# EAGLE board AutoSpielSimplified 2 Finished (EAGLE 9.2.0)
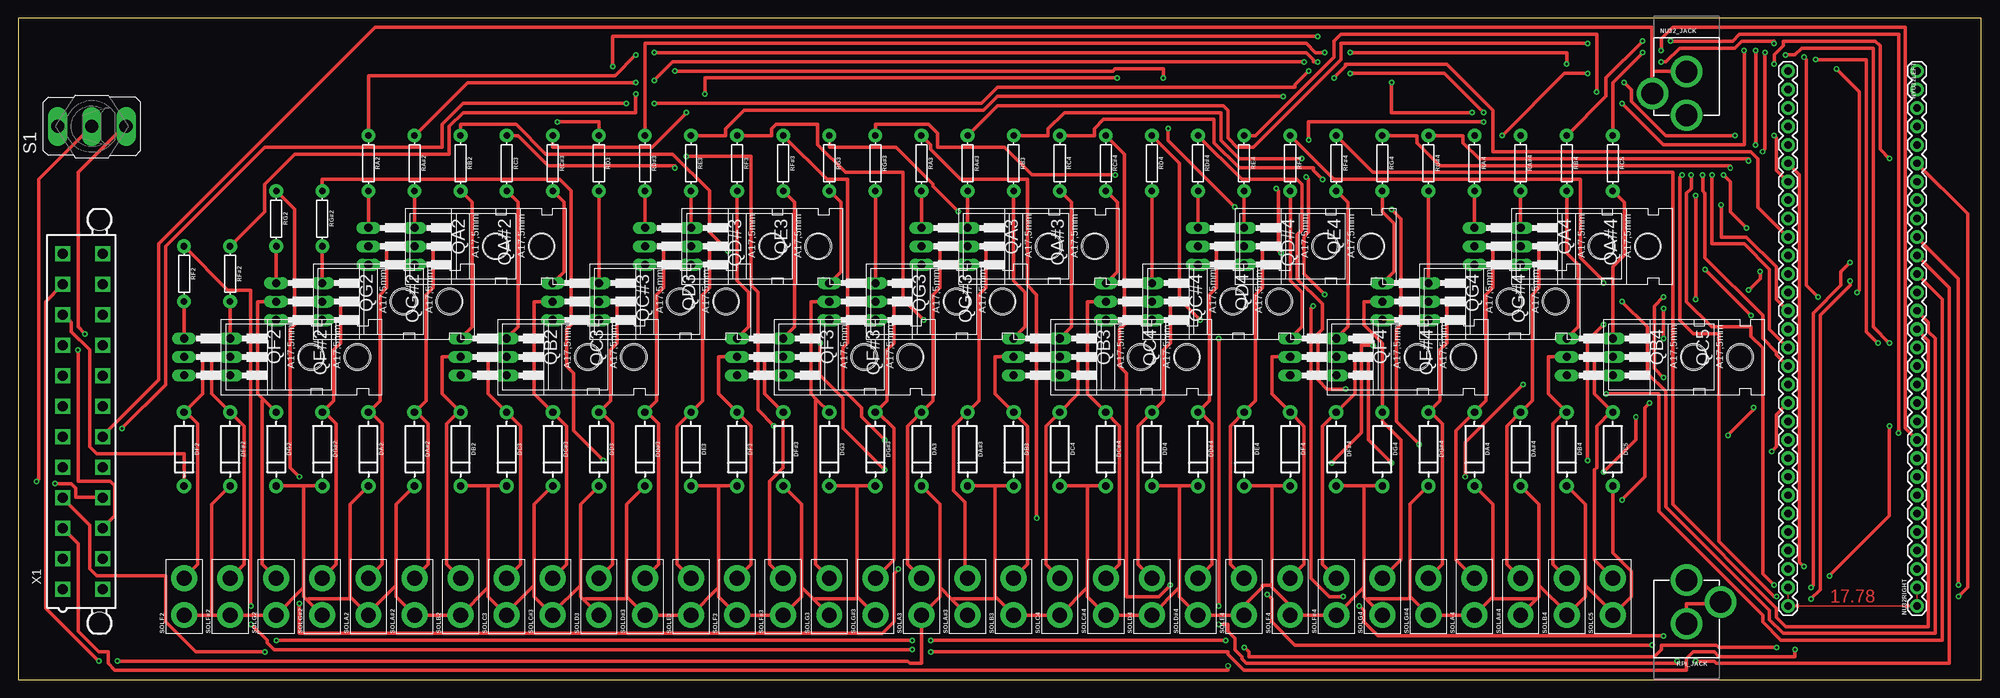
[diagram p0: board, top side]
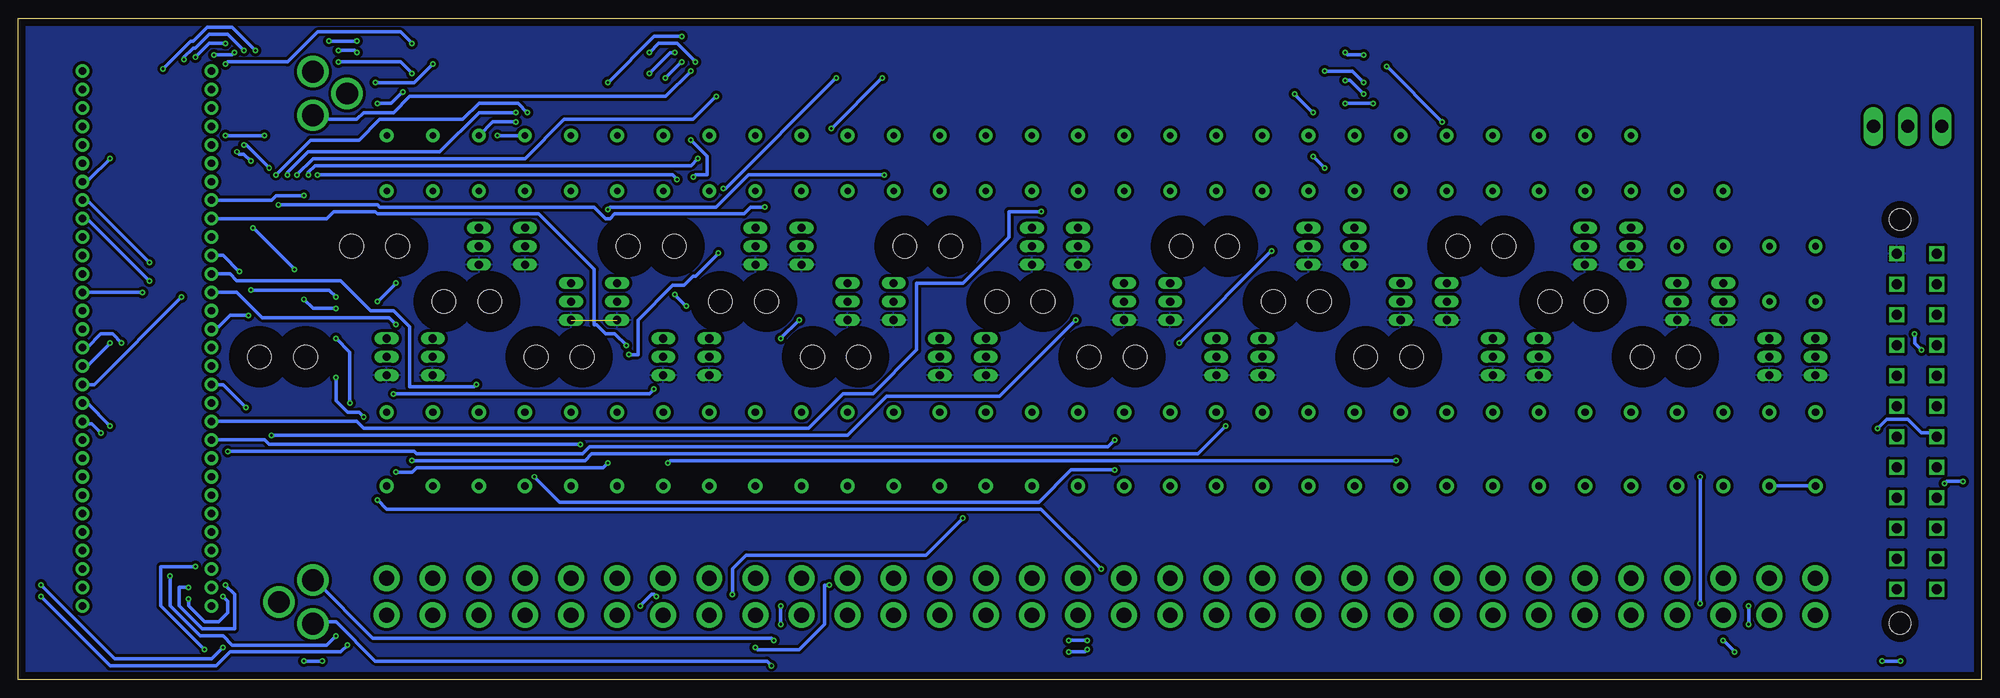
[diagram p1: board, bottom side, seen from below]

Size 270.49 x 91.11 mm. Coordinates in mm from the lower left corner, seen from the top.
Outline: 0,0 270.49,0 270.49,91.11 0,91.11 0,0
Copper layers (1*16): Top 0.035mm / dielectric 1.5mm / Bottom 0.035mm
Design rules "default *": minimum track width 18mil, minimum drill 0.35mm, track to track 16mil, track to pad 16mil, pad to pad 16mil, via to via 16mil, smd to smd 16mil, copper to edge 40mil, drill to drill 16mil, minimum pad ring 10mil, minimum via ring 8mil, stop-mask expansion 4mil, vias tented up to drill 0mil, thermal gap 10mil

## Footprints (pad centres in the part's own frame; a part is rotated, then mirrored left to right if it is on the bottom)
DIODE-1N4001 = drill 1 pad 1.981: A -5.08,0; C 5.08,0
POWER_JACK_PTH = drill 2.997 pad 4.318: GND 0,7.7; GNDBREAK 4.7,10.7; PWR 0,13.7
1X30 = drill 1.016 pad 1.88: 1 0,0; 2 2.54,0; 3 5.08,0; 4 7.62,0; 5 10.16,0; 6 12.7,0; 7 15.24,0; 8 17.78,0; 9 20.32,0; 10 22.86,0; 11 25.4,0; 12 27.94,0; 13 30.48,0; 14 33.02,0; 15 35.56,0; 16 38.1,0; 17 40.64,0; 18 43.18,0; 19 45.72,0; 20 48.26,0; 21 50.8,0; 22 53.34,0; 23 55.88,0; 24 58.42,0; 25 60.96,0; 26 63.5,0; 27 66.04,0; 28 68.58,0; 29 71.12,0; 30 73.66,0
TO220AH = drill 1.118 long: B -2.54,-6.35; C 0,-6.35; E 2.54,-6.35 | hole 3.302: 0,11.176
AXIAL-0.3 = drill 0.9 pad 1.88: P$1 -3.81,0; P$2 3.81,0
M9040P = drill 1.803 long: 1 0,4.699; 2 0,0; 3 0,-4.699
1X02_XTRA_BIG = drill 2.057 pad 3.556: 1 -2.54,0; 2 2.54,0
5566-24 = drill 1.4 square: 1 23.1,-2.75; 2 18.9,-2.75; 3 14.7,-2.75; 4 10.5,-2.75; 5 6.3,-2.75; 6 2.1,-2.75; 7 -2.1,-2.75; 8 -6.3,-2.75; 9 -10.5,-2.75; 10 -14.7,-2.75; 11 -18.9,-2.75; 12 -23.1,-2.75; 13 23.1,2.75; 14 18.9,2.75; 15 14.7,2.75; 16 10.5,2.75; 17 6.3,2.75; 18 2.1,2.75; 19 -2.1,2.75; 20 -6.3,2.75; 21 -10.5,2.75; 22 -14.7,2.75; 23 -18.9,2.75; 24 -23.1,2.75 | hole 3: 27.8,2.29; -27.8,2.29

## Placement (x,y rotation side)
DA2  1A/50V/1.1V  [DIODE-1N4001]  48.26,31.75 270 top
DA3  1A/50V/1.1V  [DIODE-1N4001]  124.46,31.75 270 top
DA4  1A/50V/1.1V  [DIODE-1N4001]  200.66,31.75 270 top
DA#2  1A/50V/1.1V  [DIODE-1N4001]  54.61,31.75 270 top
DA#3  1A/50V/1.1V  [DIODE-1N4001]  130.81,31.75 270 top
DA#4  1A/50V/1.1V  [DIODE-1N4001]  207.01,31.75 270 top
DB2  1A/50V/1.1V  [DIODE-1N4001]  60.96,31.75 270 top
DB3  1A/50V/1.1V  [DIODE-1N4001]  137.16,31.75 270 top
DB4  1A/50V/1.1V  [DIODE-1N4001]  213.36,31.75 270 top
DC3  1A/50V/1.1V  [DIODE-1N4001]  67.31,31.75 270 top
DC4  1A/50V/1.1V  [DIODE-1N4001]  143.51,31.75 270 top
DC5  1A/50V/1.1V  [DIODE-1N4001]  219.71,31.75 270 top
DC#3  1A/50V/1.1V  [DIODE-1N4001]  73.66,31.75 270 top
DC#4  1A/50V/1.1V  [DIODE-1N4001]  149.86,31.75 270 top
DD3  1A/50V/1.1V  [DIODE-1N4001]  80.01,31.75 270 top
DD4  1A/50V/1.1V  [DIODE-1N4001]  156.21,31.75 270 top
DD#3  1A/50V/1.1V  [DIODE-1N4001]  86.36,31.75 270 top
DD#4  1A/50V/1.1V  [DIODE-1N4001]  162.56,31.75 270 top
DE3  1A/50V/1.1V  [DIODE-1N4001]  92.71,31.75 270 top
DE4  1A/50V/1.1V  [DIODE-1N4001]  168.91,31.75 270 top
DF2  1A/50V/1.1V  [DIODE-1N4001]  22.86,31.75 270 top
DF3  1A/50V/1.1V  [DIODE-1N4001]  99.06,31.75 270 top
DF4  1A/50V/1.1V  [DIODE-1N4001]  175.26,31.75 270 top
DF#2  1A/50V/1.1V  [DIODE-1N4001]  29.21,31.75 270 top
DF#3  1A/50V/1.1V  [DIODE-1N4001]  105.41,31.75 270 top
DF#4  1A/50V/1.1V  [DIODE-1N4001]  181.61,31.75 270 top
DG2  1A/50V/1.1V  [DIODE-1N4001]  35.56,31.75 270 top
DG3  1A/50V/1.1V  [DIODE-1N4001]  111.76,31.75 270 top
DG4  1A/50V/1.1V  [DIODE-1N4001]  187.96,31.75 270 top
DG#2  1A/50V/1.1V  [DIODE-1N4001]  41.91,31.75 270 top
DG#3  1A/50V/1.1V  [DIODE-1N4001]  118.11,31.75 270 top
DG#4  1A/50V/1.1V  [DIODE-1N4001]  194.31,31.75 270 top
NU32_JACK  POWER_JACK  [POWER_JACK_PTH]  229.87,91.44 180 top
NU32RIGHT  [1X30]  261.62,10.16 90 top
NYU32LEFT  [1X30]  243.84,10.16 90 top
QA2  TIP120  [TO220AH]  54.61,59.69 270 top
QA3  TIP120  [TO220AH]  130.81,59.69 270 top
QA4  TIP120  [TO220AH]  207.01,59.69 270 top
QA#2  TIP120  [TO220AH]  60.96,59.69 270 top
QA#3  TIP120  [TO220AH]  137.16,59.69 270 top
QA#4  TIP120  [TO220AH]  213.36,59.69 270 top
QB2  TIP120  [TO220AH]  67.31,44.45 270 top
QB3  TIP120  [TO220AH]  143.51,44.45 270 top
QB4  TIP120  [TO220AH]  219.71,44.45 270 top
QC3  TIP120  [TO220AH]  73.66,44.45 270 top
QC4  TIP120  [TO220AH]  149.86,44.45 270 top
QC5  TIP120  [TO220AH]  226.06,44.45 270 top
QC#3  TIP120  [TO220AH]  80.01,52.07 270 top
QC#4  TIP120  [TO220AH]  156.21,52.07 270 top
QD3  TIP120  [TO220AH]  86.36,52.07 270 top
QD4  TIP120  [TO220AH]  162.56,52.07 270 top
QD#3  TIP120  [TO220AH]  92.71,59.69 270 top
QD#4  TIP120  [TO220AH]  168.91,59.69 270 top
QE3  TIP120  [TO220AH]  99.06,59.69 270 top
QE4  TIP120  [TO220AH]  175.26,59.69 270 top
QF2  TIP120  [TO220AH]  29.21,44.45 270 top
QF3  TIP120  [TO220AH]  105.41,44.45 270 top
QF4  TIP120  [TO220AH]  181.61,44.45 270 top
QF#2  TIP120  [TO220AH]  35.56,44.45 270 top
QF#3  TIP120  [TO220AH]  111.76,44.45 270 top
QF#4  TIP120  [TO220AH]  187.96,44.45 270 top
QG2  TIP120  [TO220AH]  41.91,52.07 270 top
QG3  TIP120  [TO220AH]  118.11,52.07 270 top
QG4  TIP120  [TO220AH]  194.31,52.07 270 top
QG#2  TIP120  [TO220AH]  48.26,52.07 270 top
QG#3  TIP120  [TO220AH]  124.46,52.07 270 top
QG#4  TIP120  [TO220AH]  200.66,52.07 270 top
RA2  1k  [AXIAL-0.3]  48.26,71.12 270 top
RA3  1k  [AXIAL-0.3]  124.46,71.12 270 top
RA4  1k  [AXIAL-0.3]  200.66,71.12 270 top
RA#2  1k  [AXIAL-0.3]  54.61,71.12 270 top
RA#3  1k  [AXIAL-0.3]  130.81,71.12 270 top
RA#4  1k  [AXIAL-0.3]  207.01,71.12 270 top
RB2  1k  [AXIAL-0.3]  60.96,71.12 270 top
RB3  1k  [AXIAL-0.3]  137.16,71.12 270 top
RB4  1k  [AXIAL-0.3]  213.36,71.12 270 top
RC3  1k  [AXIAL-0.3]  67.31,71.12 270 top
RC4  1k  [AXIAL-0.3]  143.51,71.12 270 top
RC5  1k  [AXIAL-0.3]  219.71,71.12 270 top
RC#3  1k  [AXIAL-0.3]  73.66,71.12 270 top
RC#4  1k  [AXIAL-0.3]  149.86,71.12 270 top
RD3  1k  [AXIAL-0.3]  80.01,71.12 270 top
RD4  1k  [AXIAL-0.3]  156.21,71.12 270 top
RD#3  1k  [AXIAL-0.3]  86.36,71.12 270 top
RD#4  1k  [AXIAL-0.3]  162.56,71.12 270 top
RE3  1k  [AXIAL-0.3]  92.71,71.12 270 top
RE4  1k  [AXIAL-0.3]  168.91,71.12 270 top
RF2  1k  [AXIAL-0.3]  22.86,55.88 270 top
RF3  1k  [AXIAL-0.3]  99.06,71.12 270 top
RF4  1k  [AXIAL-0.3]  175.26,71.12 270 top
RF#2  1k  [AXIAL-0.3]  29.21,55.88 270 top
RF#3  1k  [AXIAL-0.3]  105.41,71.12 270 top
RF#4  1k  [AXIAL-0.3]  181.61,71.12 270 top
RG2  1k  [AXIAL-0.3]  35.56,63.5 270 top
RG3  1k  [AXIAL-0.3]  111.76,71.12 270 top
RG4  1k  [AXIAL-0.3]  187.96,71.12 270 top
RG#2  1k  [AXIAL-0.3]  41.91,63.5 270 top
RG#3  1k  [AXIAL-0.3]  118.11,71.12 270 top
RG#4  1k  [AXIAL-0.3]  194.31,71.12 270 top
RPI_JACK  POWER_JACK  [POWER_JACK_PTH]  229.87,0 0 top
S1  [M9040P]  10.16,76.2 90 top
SOLA2  [1X02_XTRA_BIG]  48.26,11.43 90 top
SOLA3  [1X02_XTRA_BIG]  124.46,11.43 90 top
SOLA4  [1X02_XTRA_BIG]  200.66,11.43 90 top
SOLA#2  [1X02_XTRA_BIG]  54.61,11.43 90 top
SOLA#3  [1X02_XTRA_BIG]  130.81,11.43 90 top
SOLA#4  [1X02_XTRA_BIG]  207.01,11.43 90 top
SOLB2  [1X02_XTRA_BIG]  60.96,11.43 90 top
SOLB3  [1X02_XTRA_BIG]  137.16,11.43 90 top
SOLB4  [1X02_XTRA_BIG]  213.36,11.43 90 top
SOLC3  [1X02_XTRA_BIG]  67.31,11.43 90 top
SOLC4  [1X02_XTRA_BIG]  143.51,11.43 90 top
SOLC5  [1X02_XTRA_BIG]  219.71,11.43 90 top
SOLC#3  [1X02_XTRA_BIG]  73.66,11.43 90 top
SOLC#4  [1X02_XTRA_BIG]  149.86,11.43 90 top
SOLD3  [1X02_XTRA_BIG]  80.01,11.43 90 top
SOLD4  [1X02_XTRA_BIG]  156.21,11.43 90 top
SOLD#3  [1X02_XTRA_BIG]  86.36,11.43 90 top
SOLD#4  [1X02_XTRA_BIG]  162.56,11.43 90 top
SOLE3  [1X02_XTRA_BIG]  92.71,11.43 90 top
SOLE4  [1X02_XTRA_BIG]  168.91,11.43 90 top
SOLF2  [1X02_XTRA_BIG]  22.86,11.43 90 top
SOLF3  [1X02_XTRA_BIG]  99.06,11.43 90 top
SOLF4  [1X02_XTRA_BIG]  175.26,11.43 90 top
SOLF#2  [1X02_XTRA_BIG]  29.21,11.43 90 top
SOLF#3  [1X02_XTRA_BIG]  105.41,11.43 90 top
SOLF#4  [1X02_XTRA_BIG]  181.61,11.43 90 top
SOLG2  [1X02_XTRA_BIG]  35.56,11.43 90 top
SOLG3  [1X02_XTRA_BIG]  111.76,11.43 90 top
SOLG4  [1X02_XTRA_BIG]  187.96,11.43 90 top
SOLG#2  [1X02_XTRA_BIG]  41.91,11.43 90 top
SOLG#3  [1X02_XTRA_BIG]  118.11,11.43 90 top
SOLG#4  [1X02_XTRA_BIG]  194.31,11.43 90 top
X1  5566-24  [5566-24]  8.89,35.56 270 top

## Library data of the parts
DA2-DA4 DA#2-DA#4 DB2-DB4 DC3-DC5 DC#3 DC#4 DD3 DD4 DD#3 DD#4 DE3 DE4 DF2-DF4 DF#2-DF#4 DG2-DG4 DG#2-DG#4 = SparkFun-DiscreteSemi; PROD_ID: DIO-09176
NU32_JACK RPI_JACK = SparkFun-Connectors; PROD_ID: CONN-08197
NU32RIGHT NYU32LEFT SOLA2-SOLA4 SOLA#2-SOLA#4 SOLB2-SOLB4 SOLC3-SOLC5 SOLC#3 SOLC#4 SOLD3 SOLD4 SOLD#3 SOLD#4 SOLE3 SOLE4 SOLF2-SOLF4 SOLF#2-SOLF#4 SOLG2-SOLG4 SOLG#2-SOLG#4 = SparkFun-Connectors
QA2-QA4 QA#2-QA#4 QB2-QB4 QC3-QC5 QC#3 QC#4 QD3 QD4 QD#3 QD#4 QE3 QE4 QF2-QF4 QF#2-QF#4 QG2-QG4 QG#2-QG#4 = transistor-power
RA2-RA4 RA#2-RA#4 RB2-RB4 RC3-RC5 RC#3 RC#4 RD3 RD4 RD#3 RD#4 RE3 RE4 RF2-RF4 RF#2-RF#4 RG2-RG4 RG#2-RG#4 = SparkFun-Resistors; PROD_ID: RES-08380
S1 = switch
X1 = con-molex; MF: MOLEX; OC_FARNELL: unknown; OC_NEWARK: unknown

## Nets
A2: NYU32LEFT.21 RA2.P$1
A3: NU32RIGHT.25 RA3.P$1
A4: NU32RIGHT.13 RA4.P$1
A#2: NYU32LEFT.20 RA#2.P$1
A#3: NU32RIGHT.24 RA#3.P$1
A#4: NU32RIGHT.12 RA#4.P$1
B2: NYU32LEFT.19 RB2.P$1
B3: NU32RIGHT.23 RB3.P$1
B4: NU32RIGHT.11 RB4.P$1
C3: NYU32LEFT.18 RC3.P$1
C4: NU32RIGHT.22 RC4.P$1
C5: NU32RIGHT.10 RC5.P$1
C#3: NYU32LEFT.17 RC#3.P$1
C#4: NU32RIGHT.21 RC#4.P$1
D3: NYU32LEFT.16 RD3.P$1
D4: NU32RIGHT.20 RD4.P$1
D#3: NYU32LEFT.15 RD#3.P$1
D#4: NU32RIGHT.19 RD#4.P$1
E3: NYU32LEFT.14 RE3.P$1
E4: NU32RIGHT.18 RE4.P$1
F2: NYU32LEFT.25 RF2.P$1
F3: NYU32LEFT.13 RF3.P$1
F4: NU32RIGHT.17 RF4.P$1
F#2: NYU32LEFT.24 RF#2.P$1
F#3: NYU32LEFT.12 RF#3.P$1
F#4: NU32RIGHT.16 RF#4.P$1
G2: NYU32LEFT.23 RG2.P$1
G3: NYU32LEFT.11 RG3.P$1
G4: NU32RIGHT.15 RG4.P$1
G#2: NYU32LEFT.22 RG#2.P$1
G#3: NYU32LEFT.10 RG#3.P$1
G#4: NU32RIGHT.14 RG#4.P$1
GND: QA2.E QA3.E QA4.E QA#2.E QA#3.E QA#4.E QB2.E QB3.E QB4.E QC3.E QC4.E QC5.E QC#3.E QC#4.E QD3.E QD4.E QD#3.E QD#4.E QE3.E QE4.E QF2.E QF3.E QF4.E QF#2.E QF#3.E QF#4.E QG2.E QG3.E QG4.E QG#2.E QG#3.E QG#4.E X1.24
N$1: QF2.B RF2.P$2
N$2: QC#3.B RC#3.P$2
N$3: DF2.A QF2.C SOLF2.2
N$4: QF#2.B RF#2.P$2
N$5: DF#2.A QF#2.C SOLF#2.2
N$6: DC#3.A QC#3.C SOLC#3.2
N$7: QG2.B RG2.P$2
N$8: DG2.A QG2.C SOLG2.2
N$9: QD3.B RD3.P$2
N$10: QG#2.B RG#2.P$2
N$11: DG#2.A QG#2.C SOLG#2.2
N$12: DD3.A QD3.C SOLD3.2
N$13: QA2.B RA2.P$2
N$14: DA2.A QA2.C SOLA2.2
N$15: QD#3.B RD#3.P$2
N$16: QA#2.B RA#2.P$2
N$17: DA#2.A QA#2.C SOLA#2.2
N$18: DD#3.A QD#3.C SOLD#3.2
N$19: QB2.B RB2.P$2
N$20: DB2.A QB2.C SOLB2.2
N$21: QE3.B RE3.P$2
N$22: QC3.B RC3.P$2
N$23: DC3.A QC3.C SOLC3.2
N$24: DE3.A QE3.C SOLE3.2
N$25: QA3.B RA3.P$2
N$26: DA3.A QA3.C SOLA3.2
N$27: QF3.B RF3.P$2
N$28: DF3.A QF3.C SOLF3.2
N$29: QF#3.B RF#3.P$2
N$30: DF#3.A QF#3.C SOLF#3.2
N$31: QG3.B RG3.P$2
N$32: DG3.A QG3.C SOLG3.2
N$33: QG#3.B RG#3.P$2
N$34: DG#3.A QG#3.C SOLG#3.2
N$35: QF4.B RF4.P$2
N$36: DF4.A QF4.C SOLF4.2
N$37: QF#4.B RF#4.P$2
N$38: DF#4.A QF#4.C SOLF#4.2
N$39: QG4.B RG4.P$2
N$40: DG4.A QG4.C SOLG4.2
N$41: QG#4.B RG#4.P$2
N$42: DG#4.A QG#4.C SOLG#4.2
N$43: QA4.B RA4.P$2
N$44: DA4.A QA4.C SOLA4.2
N$45: QA#4.B RA#4.P$2
N$46: DA#4.A QA#4.C SOLA#4.2
N$47: QB4.B RB4.P$2
N$48: DB4.A QB4.C SOLB4.2
N$49: QC5.B RC5.P$2
N$50: DC5.A QC5.C SOLC5.2
N$52: QA#3.B RA#3.P$2
N$53: DA#3.A QA#3.C SOLA#3.2
N$55: QB3.B RB3.P$2
N$56: DB3.A QB3.C SOLB3.2
N$57: S1.1
N$58: QC4.B RC4.P$2
N$59: DC4.A QC4.C SOLC4.2
N$61: QC#4.B RC#4.P$2
N$62: DC#4.A QC#4.C SOLC#4.2
N$64: QD4.B RD4.P$2
N$65: DD4.A QD4.C SOLD4.2
N$67: QD#4.B RD#4.P$2
N$68: DD#4.A QD#4.C SOLD#4.2
N$70: QE4.B RE4.P$2
N$71: DE4.A QE4.C SOLE4.2
NU32GND: NU32_JACK.GND NU32_JACK.GNDBREAK X1.18
NU32PWR: NU32_JACK.PWR X1.6
PS_ON: S1.2 X1.16
PS_ONGND: S1.3 X1.15
RPI_GND: RPI_JACK.GND RPI_JACK.GNDBREAK X1.3
RPI_PWR: RPI_JACK.PWR X1.4
VDD1: DA2.C DA#2.C DB2.C DC3.C DC#3.C DD3.C DD#3.C DE3.C DF2.C DF3.C DF#2.C DF#3.C DG2.C DG3.C DG#2.C DG#3.C SOLA2.1 SOLA#2.1 SOLB2.1 SOLC3.1 SOLC#3.1 SOLD3.1 SOLD#3.1 SOLE3.1 SOLF2.1 SOLF3.1 SOLF#2.1 SOLF#3.1 SOLG2.1 SOLG3.1 SOLG#2.1 SOLG#3.1 X1.10
VDD2: DA3.C DA4.C DA#3.C DA#4.C DB3.C DB4.C DC4.C DC5.C DC#4.C DD4.C DD#4.C DE4.C DF4.C DF#4.C DG4.C DG#4.C SOLA3.1 SOLA4.1 SOLA#3.1 SOLA#4.1 SOLB3.1 SOLB4.1 SOLC4.1 SOLC5.1 SOLC#4.1 SOLD4.1 SOLD#4.1 SOLE4.1 SOLF4.1 SOLF#4.1 SOLG4.1 SOLG#4.1 X1.11

## Tracks (layer width: path | path; a pad name or v marks a point on that pad's centre or on a via)
A2  (via drill 0.35)
  Top 0.457: NYU32LEFT.21 239.71,65.09 239.71,71.75 238.76,72.71 203.2,72.71 203.2,78.42 196.85,84.77 182.88,84.77 182.88,84.45 v181.29,82.87 | v179.07,85.09 178.44,85.09 178.44,85.41 177.48,86.36 v87.63,86.36 | v85.09,86.04 82.23,83.19 48.26,83.19 RA2.P$1
  Bottom 0.457: v179.07,85.09 v181.29,82.87 | v87.63,86.36 87.31,86.04 v85.09,86.04
A3  (via drill 0.35)
  Top 0.457: RA3.P$1 125.73,73.66 125.73,73.03 129.86,68.9 139.06,68.9 139.06,54.29 140.34,53.02 v140.34,22.23 | v172.09,11.75 172.72,11.11 172.72,7.94 175.9,4.76 v225.11,4.76 | v267.33,11.43 268.61,12.7 268.61,64.13 NU32RIGHT.25
  Bottom 0.457: v140.34,22.23 145.41,17.15 170.18,17.15 172.09,15.24 v172.09,11.75 | v225.11,4.76 226.06,3.81 241.3,3.81 243.21,1.91 257.81,1.91 v267.33,11.43
A4  (via drill 0.35)
  Top 0.457: v204.47,74.93 213.04,83.5 v216.22,83.5 | v226.38,85.09 227.01,85.09 228.92,87 236.54,87 237.49,87.95 241.94,87.95 v241.94,87.63 | v246.06,85.72 246.38,85.41 246.38,54.29 v247.97,52.71
  Bottom 0.457: v204.47,74.93 RA4.P$1 | v216.22,83.5 217.81,85.09 v226.38,85.09 | v241.94,87.63 244.16,87.63 v246.06,85.72 | v247.97,52.71 260.03,40.64 NU32RIGHT.13
A#2  (via drill 0.35)
  Top 0.457: RA#2.P$1 61.91,82.23 v85.09,82.23 | v90.49,83.82 150.81,83.82 151.13,84.14 157.8,84.14 v157.8,82.87 | v173.35,67.63 173.67,67.31 173.67,59.05 v173.99,58.74 | v186.37,44.77 186.06,44.45 186.06,33.02 v189.23,29.85 | v218.44,28.57 222.88,33.02 v222.88,36.2 | v226.69,41.59 225.43,42.86 225.43,51.43 v226.69,52.71 | v238.44,53.66 240.03,55.24 v240.03,56.2
  Bottom 0.457: v85.09,82.23 86.68,83.82 v90.49,83.82 | v157.8,82.87 173.04,67.63 v173.35,67.63 | v173.99,58.74 177.16,55.56 177.48,55.56 178.75,54.29 180.34,54.29 185.1,49.53 185.1,44.77 v186.37,44.77 | v189.23,29.85 189.87,29.21 215.58,29.21 216.22,28.57 v218.44,28.57 | v222.88,36.2 223.52,36.83 225.11,36.83 226.69,38.42 v226.69,41.59 | v226.69,52.71 227.65,53.66 v238.44,53.66 | v240.03,56.2 242.25,58.42 NYU32LEFT.20
A#3  (via drill 0.35)
  Top 0.457: v257.81,71.75 256.54,73.03 256.54,87.31 255.91,87.95 243.21,87.95 243.21,87.31 241.94,86.04 v241.94,84.77 | v216.22,87.63 182.25,87.63 182.25,85.41 170.18,73.34 167.96,73.34 166.69,74.61 166.69,78.42 166.05,79.06 134.94,79.06 RA#3.P$1
  Bottom 0.457: NU32RIGHT.24 261.3,68.9 260.67,68.9 v257.81,71.75 | v241.94,84.77 241.62,85.09 233.36,85.09 229.24,89.22 217.81,89.22 v216.22,87.63
A#4  (via drill 0.35)
  Top 0.457: v201.93,76.83 177.8,76.83 v177.8,74.29 | v177.48,69.22 177.8,68.9 177.8,61.6 177.16,60.96 177.16,55.88 v180.02,53.02 | v178.44,51.43 178.12,51.12 178.12,13.97 180.66,11.43 v182.56,11.43 | v184.78,10.16 185.42,9.52 185.42,7.94 187.32,6.03 v226.69,6.03 | v249.56,14.29 257.81,22.54 v257.81,34.93
  Bottom 0.457: RA#4.P$1 205.1,76.83 v201.93,76.83 | v177.8,74.29 175.58,72.07 175.58,69.53 177.16,69.53 v177.48,69.22 | v178.44,51.43 v180.02,53.02 | v182.56,11.43 182.88,11.75 183.2,11.75 v184.78,10.16 | v226.69,6.03 227.97,4.76 240.98,4.76 242.25,6.03 245.43,6.03 249.56,10.16 v249.56,14.29 | v257.81,34.93 260.99,38.1 NU32RIGHT.12
B2  (via drill 0.35)
  Top 0.457: v207.33,40.64 199.39,32.7 v199.39,27.94 | v119.38,28.89 113.67,34.61 113.67,38.73 110.49,41.91 v110.49,46.35 | v97.79,59.05 95.25,61.6 95.25,67.31 90.17,72.39 72.71,72.39 68.58,76.52 60.96,76.52 RB2.P$1
  Bottom 0.457: NYU32LEFT.19 241.3,55.88 240.35,54.93 226.06,54.93 221.93,50.8 218.76,50.8 216.53,48.58 216.53,40.32 207.65,40.32 v207.33,40.64 | v199.39,27.94 195.9,24.45 129.86,24.45 125.41,28.89 v119.38,28.89 | v97.79,59.05 v110.49,46.35
B3  (via drill 0.35)
  Top 0.457: RB3.P$1 141.92,74.93 141.92,75.88 144.15,78.1 165.74,78.1 165.74,74.29 168.28,71.75 v176.85,71.75 | v230.5,69.53 230.5,67.63 229.87,66.99 229.87,52.07 233.36,48.58 238.76,48.58 238.76,47.31 240.35,45.72 240.35,14.6 v241.94,13.02 | v247.01,12.7 247.33,13.02 247.33,50.48 251.14,54.29 251.14,56.2 v252.41,57.47
  Bottom 0.457: v176.85,71.75 177.8,70.8 229.55,70.8 230.5,69.85 v230.5,69.53 | v241.94,13.02 240.66,11.75 240.66,6.98 245.11,6.98 248.28,10.16 248.28,12.7 v247.01,12.7 | v252.41,57.47 260.99,66.04 NU32RIGHT.23
B4  (via drill 0.35)
  Top 0.457: RB4.P$1 218.76,80.33 218.76,82.87 v223.84,87.95 | v227.65,87.95 236.22,87.95 237.17,88.9 259.08,88.9 v259.08,33.97
  Bottom 0.457: v227.65,87.95 v223.84,87.95 | v259.08,33.97 260.35,35.24 261.3,35.24 NU32RIGHT.11
C3  (via drill 0.35)
  Top 0.457: RC3.P$1 68.9,74.93 73.03,70.8 90.49,70.8 v90.49,70.48 | v92.08,72.07 100.97,72.07 100.97,54.29 101.92,53.34 101.92,37.15 v104.14,34.93 | v216.22,30.16 216.22,46.67 v218.44,48.9
  Bottom 0.457: v92.08,72.07 v90.49,70.48 | v104.14,34.93 107.95,31.12 191.45,31.12 192.41,30.16 v216.22,30.16 | v218.44,48.9 219.39,49.85 236.85,49.85 240.35,53.34 NYU32LEFT.18
C4  (via drill 0.35)
  Top 0.457: RC4.P$1 148.27,74.93 148.27,75.88 149.54,77.15 164.78,77.15 164.78,73.98 168.28,70.48 178.44,70.48 178.44,70.17 v179.71,68.9 | v229.24,69.53 228.92,69.22 228.92,49.53 230.82,47.62 234.31,47.62 234.31,19.05 241.94,11.43 v242.25,11.43 | v247.01,11.11 248.28,12.38 248.28,50.16 252.41,54.29 v252.41,54.93
  Bottom 0.457: v179.71,68.9 180.34,69.53 v229.24,69.53 | v242.25,11.43 241.62,10.79 241.62,9.21 242.89,7.94 244.79,7.94 247.01,10.16 v247.01,11.11 | v252.41,54.93 260.99,63.5 NU32RIGHT.22
C5  (via drill 0.35)
  Top 0.457: RC5.P$1 219.71,82.23 v223.84,86.36 | v226.38,86.68 226.38,88.26 227.97,89.85 260.03,89.85 260.03,34.61 NU32RIGHT.10
  Bottom 0.457: v223.84,86.36 224.16,86.68 v226.38,86.68
C#3  (via drill 0.35)
  Top 0.457: NYU32LEFT.17 242.25,52.39 242.25,56.83 238.12,60.96 234.63,60.96 v234.63,65.41 | v167.64,65.09 158.43,74.29 v158.43,75.88 | v151.45,82.87 94.61,82.87 v94.61,80.64 | v92.08,78.1 87.31,73.34 73.66,73.34 RC#3.P$1
  Bottom 0.457: v234.63,65.41 220.98,65.41 220.66,65.09 191.13,65.09 189.55,63.5 188.91,63.5 188.28,64.13 170.5,64.13 169.54,65.09 v167.64,65.09 | v151.45,82.87 v158.43,75.88 | v92.08,78.1 v94.61,80.64
C#4  (via drill 0.35)
  Top 0.457: NU32RIGHT.21 267.33,55.24 v267.33,13.02 | v242.25,4.45 234.31,4.45 234,4.76 226.38,4.76 226.38,4.13 225.43,3.18 169.54,3.18 169.54,3.81 v168.91,4.45 | v158.75,13.02 157.16,11.43 152.72,11.43 152.72,42.23 151.76,43.18 151.76,48.26 152.4,48.9 152.4,72.39 RC#4.P$1
  Bottom 0.457: v267.33,13.02 257.18,2.86 243.84,2.86 v242.25,4.45 | v168.91,4.45 168.59,4.13 162.88,4.13 159.38,7.62 159.38,13.02 v158.75,13.02
D3  (via drill 0.35)
  Top 0.457: v232.41,56.51 v238.76,50.16 | v238.12,62.23 235.9,64.45 235.9,68.58 v234.95,69.53 | v200.34,78.1 189.23,78.1 v189.23,82.23 | v179.07,88.58 81.92,88.58 v81.92,84.45 | v74.3,76.83 80.01,76.83 RD3.P$1
  Bottom 0.457: NYU32LEFT.16 243.52,48.58 242.89,48.58 241.3,50.16 v238.76,50.16 | v238.12,62.23 v232.41,56.51 | v234.95,69.53 230.19,74.29 223.52,74.29 220.66,77.15 209.23,77.15 207.01,79.38 201.61,79.38 v200.34,78.1 | v189.23,82.23 182.88,88.58 v179.07,88.58 | v74.3,76.83 v81.92,84.45
D4  (via drill 0.35)
  Top 0.457: RD4.P$1 160.02,71.12 160.02,52.39 v162.88,49.53 | v165.42,10.16 v165.42,46.99 | v165.42,7.62 166.69,7.62 166.69,6.67 167.64,5.71 167.64,4.13 168.59,3.18 168.59,2.86 169.23,2.22 228.6,2.22 v228.6,2.54 | v231.14,2.54 233.68,2.54 234,2.22 266.06,2.22 266.06,53.98 NU32RIGHT.20
  Bottom 0.457: v165.42,46.99 v162.88,49.53 | v165.42,7.62 v165.42,10.16 | v231.14,2.54 v228.6,2.54
D#3  (via drill 0.35)
  Top 0.457: NYU32LEFT.15 241.3,48.26 241.3,56.51 237.81,60.01 233.36,60.01 v233.36,69.53 | v201.93,78.1 196.53,83.5 v183.51,83.5 | v180.02,86.36 178.75,86.36 177.48,87.63 86.36,87.63 RD#3.P$1
  Bottom 0.457: v233.36,69.53 233.36,69.85 230.5,72.71 212.41,72.71 207.01,78.1 v201.93,78.1 | v183.51,83.5 180.66,86.36 v180.02,86.36
D#4  (via drill 0.35)
  Top 0.457: RD#4.P$1 168.59,68.9 176.21,68.9 176.85,68.26 176.85,61.91 176.21,61.28 176.21,55.24 179.71,51.75 179.71,48.26 179.07,47.62 179.07,41.27 180.34,40.01 v182.88,40.01 | v218.76,39.37 226.06,39.37 226.06,23.18 240.35,8.89 240.35,7.94 242.89,5.4 265.11,5.4 265.11,52.39 NU32RIGHT.19
  Bottom 0.457: v182.88,40.01 183.51,39.37 v218.76,39.37
E3  (via drill 0.35)
  Top 0.457: RE3.P$1 97.47,74.93 97.47,75.88 100.01,78.42 133.03,78.42 134.94,80.33 v174.31,80.33 | v232.09,69.53 232.09,67.31 232.41,66.99 232.41,58.1 240.35,50.16 240.35,46.99 242.25,45.09 242.25,44.77 NYU32LEFT.14
  Bottom 0.457: v174.31,80.33 177.48,77.15 195.26,77.15 200.66,71.75 229.87,71.75 v232.09,69.53
E4  (via drill 0.35)
  Top 0.457: RE4.P$1 170.5,74.93 181.29,85.72 181.29,87.95 182.25,88.9 217.49,88.9 v217.49,80.96 | v220.98,79.38 226.69,73.66 237.81,73.66 v237.81,86.68 | v250.51,84.14 253.68,80.96 253.68,53.66 v253.37,53.34
  Bottom 0.457: v217.49,80.96 219.07,79.38 v220.98,79.38 | v237.81,86.68 240.98,89.85 244.47,89.85 246.38,87.95 246.7,87.95 v250.51,84.14 | NU32RIGHT.18 v253.37,53.34
F2  (via drill 0.35)
  Top 0.457: RF2.P$1 28.89,53.66 32.07,53.66 v32.07,10.16 | v32.07,7.62 34.29,5.4 34.29,5.08 35.24,4.13 v123.19,4.13 | v125.73,3.81 166.69,3.81 166.69,3.49 168.91,1.27 229.87,1.27 229.87,2.86 230.82,3.81 233.68,3.81 234.31,3.18 244.79,3.18 v244.79,4.13 | v246.06,15.56 245.43,16.19 245.43,69.53 NYU32LEFT.25
  Bottom 0.457: v32.07,7.62 v32.07,10.16 | v123.19,4.13 123.51,3.81 v125.73,3.81 | v244.79,4.13 250.82,10.16 250.82,15.56 v246.06,15.56
F3  (via drill 0.35)
  Top 0.457: RF3.P$1 103.82,74.93 103.82,75.88 104.46,76.52 110.17,76.52 110.17,73.66 113.98,69.85 121.92,69.85 121.92,52.39 v124.78,49.53 | v235.59,33.65 239.08,37.15 v239.08,37.46
  Bottom 0.457: v124.78,49.53 135.25,39.05 150.81,39.05 156.21,33.65 v235.59,33.65 | v239.08,37.46 242.25,40.64 NYU32LEFT.13
F4  (via drill 0.35)
  Top 0.457: RF4.P$1 181.29,68.9 215.26,68.9 215.26,58.1 218.44,54.93 v218.44,54.61 | v220.98,52.07 224.47,48.58 224.47,42.23 227.01,39.69 227.01,23.81 241.3,9.52 241.3,8.26 243.21,6.35 264.16,6.35 264.16,46.99 263.21,47.94 263.21,49.21 NU32RIGHT.17
  Bottom 0.457: v220.98,52.07 v218.44,54.61
F#2  (via drill 0.35)
  Top 0.457: RF#2.P$1 33.97,64.45 33.97,68.26 38.1,72.39 59.37,72.39 59.37,76.2 61.28,78.1 85.09,78.1 v85.09,80.64 | v87.63,82.55 90.17,85.09 v177.16,85.09 | v183.51,86.36 213.36,86.36 v213.36,84.77 | v221.3,82.23 222.25,81.28 222.25,79.69 227.01,74.93 v236.54,74.93 | v241.94,74.93 242.25,74.61 242.25,70.17 NYU32LEFT.24
  Bottom 0.457: v85.09,80.64 87,82.55 v87.63,82.55 | v177.16,85.09 179.71,87.63 182.25,87.63 v183.51,86.36 | v213.36,84.77 215.9,82.23 v221.3,82.23 | v241.94,74.93 v236.54,74.93
F#3  (via drill 0.35)
  Top 0.457: RF#3.P$1 111.44,68.9 114.3,68.9 114.3,46.35 113.67,45.72 113.67,40.01 116.2,37.46 116.2,36.2 v119.38,33.02 | v241.62,31.43 242.25,32.07 242.25,36.51 NYU32LEFT.12
  Bottom 0.457: v119.38,33.02 120.33,32.07 191.77,32.07 192.72,31.12 215.58,31.12 215.9,31.43 v241.62,31.43
F#4
  Top 0.457: RF#4.P$1 186.69,69.85 227.97,69.85 227.97,24.13 242.25,9.84 242.25,8.57 243.52,7.3 263.21,7.3 263.21,46.67 NU32RIGHT.16
G2  (via drill 0.35)
  Top 0.457: v231.14,52.39 v231.14,66.68 | v226.69,46.99 v226.69,51.12 | v224.79,38.1 224.16,37.46 224.16,27.94 v220.98,24.76 | v121.28,15.24 120.65,14.6 120.65,7.94 119.06,6.35 38.73,6.35 v38.73,10.48 | v38.73,27.94 37.47,29.21 37.47,48.26 38.1,48.9 38.1,64.77 RG2.P$1
  Bottom 0.457: NYU32LEFT.23 235.59,66.04 234.95,66.68 v231.14,66.68 | v231.14,52.39 229.87,51.12 v226.69,51.12 | v226.69,46.99 224.79,45.09 v224.79,38.1 | v220.98,24.76 219.71,23.49 129.54,23.49 v121.28,15.24 | v38.73,27.94 v38.73,10.48
G3  (via drill 0.35)
  Top 0.457: v129.54,64.45 126.05,67.94 126.05,68.26 120.97,73.34 111.76,73.34 RG3.P$1
  Bottom 0.457: NYU32LEFT.11 223.84,35.56 222.88,34.61 161.61,34.61 156.84,39.37 152.72,39.37 146.69,45.4 146.69,54.61 140.34,54.61 133.99,60.96 133.99,64.45 v129.54,64.45
G4  (via drill 0.35)
  Top 0.457: RG4.P$1 192.72,74.93 192.72,73.98 195.9,70.8 235.9,70.8 v235.9,70.48 | v239.4,86.68 v239.4,73.66 | v247.65,85.41 254.63,85.41 254.63,47.94 v256.22,46.35
  Bottom 0.457: v235.9,70.48 239.08,73.66 v239.4,73.66 | v239.4,86.68 241.62,88.9 244.16,88.9 246.06,87 246.38,87 247.65,85.72 v247.65,85.41 | v256.22,46.35 257.49,47.62 259.08,47.62 260.99,45.72 NU32RIGHT.15
G#2  (via drill 0.35)
  Top 0.457: v186.69,46.04 185.1,46.04 185.1,33.97 v180.97,29.85 | v80.64,30.16 76.52,34.29 76.52,42.23 75.56,43.18 75.56,48.26 76.2,48.9 76.2,67.31 74.61,68.9 41.91,68.9 RG#2.P$1
  Bottom 0.457: NYU32LEFT.22 227.97,63.5 227.01,64.45 221.3,64.45 220.98,64.13 198.75,64.13 191.13,56.51 191.13,48.9 190.82,48.9 189.55,47.62 188.28,47.62 v186.69,46.04 | v180.97,29.85 180.66,30.16 v80.64,30.16
G#3  (via drill 0.35)
  Top 0.457: v193.04,32.38 189.87,35.56 189.87,48.26 190.5,48.9 190.5,63.5 v189.23,64.77 | v151.13,69.53 139.7,69.53 135.89,73.34 126.68,73.34 126.68,75.25 125.41,76.52 118.11,76.52 RG#3.P$1
  Bottom 0.457: NYU32LEFT.10 236.54,33.02 235.9,32.38 v193.04,32.38 | v189.23,64.77 188.91,65.09 174.31,65.09 169.86,69.53 v151.13,69.53
G#4  (via drill 0.35)
  Top 0.457: RG#4.P$1 199.07,74.93 199.07,73.98 201.29,71.75 238.44,71.75 v238.44,71.44 | v240.35,72.71 240.66,73.03 v240.66,86.36 | v243.52,86.04 244.79,86.04 245.75,87 255.59,87 255.59,48.58 v257.81,46.35
  Bottom 0.457: v238.44,71.44 239.4,72.39 240.03,72.39 v240.35,72.71 | v240.66,86.36 240.98,86.04 v243.52,86.04 | v257.81,46.35 260.99,43.18 NU32RIGHT.14
GND  (1 unrouted)
  pour Bottom: 0,91.44 0,0 270.51,0 270.51,91.44
  pour Bottom: 0,91.44 0,0 270.51,0 270.51,90.17 270.51,91.44
N$1
  Top 0.457: RF2.P$2 QF2.B
N$2
  Top 0.457: QC#3.B 75.25,56.2 75.25,65.72 RC#3.P$2
N$3
  Top 0.457: QF2.C 25.4,44.45 25.4,39.37 DF2.A 23.18,36.83 24.77,35.24 24.77,15.87 SOLF2.2
N$4
  Top 0.457: RF#2.P$2 QF#2.B
N$5
  Top 0.457: QF#2.C 26.67,44.45 26.67,39.37 DF#2.A 31.11,34.93 31.11,15.87 SOLF#2.2
N$6
  Top 0.457: QC#3.C 71.12,52.07 71.12,39.37 DC#3.A 75.56,34.93 75.56,15.87 SOLC#3.2
N$7
  Top 0.457: RG2.P$2 QG2.B
N$8
  Top 0.457: QG2.C 33.02,52.07 33.02,39.37 33.81,38.58 | DG2.A 33.81,38.58 | SOLG2.2 33.66,15.87 33.66,38.42 33.81,38.58
N$9
  Top 0.457: RD3.P$2 QD3.B
N$10
  Top 0.457: RG#2.P$2 QG#2.B
N$11
  Top 0.457: QG#2.C 44.45,52.07 44.45,46.35 43.5,45.4 43.5,38.42 DG#2.A 42.23,36.83 43.81,35.24 43.81,15.87 SOLG#2.2
N$12
  Top 0.457: QD3.C 82.55,52.07 82.55,46.35 81.6,45.4 81.6,38.42 DD3.A 80.33,36.83 81.92,35.24 81.92,15.87 SOLD3.2
N$13
  Top 0.457: RA2.P$2 QA2.B
N$14
  Top 0.457: QA2.C 50.8,59.69 50.8,53.98 49.85,53.02 49.85,38.42 DA2.A 48.58,36.83 50.16,35.24 50.16,15.87 SOLA2.2
N$15
  Top 0.457: RD#3.P$2 QD#3.B
N$16
  Top 0.457: RA#2.P$2 QA#2.B
N$17
  Top 0.457: QA#2.C 57.15,59.69 57.15,53.98 56.2,53.02 56.2,38.42 DA#2.A 54.93,36.83 56.52,35.24 56.52,15.87 SOLA#2.2
N$18
  Top 0.457: QD#3.C 88.9,59.69 88.9,53.98 87.95,53.02 87.95,38.42 DD#3.A 86.68,36.83 88.27,35.24 88.27,15.87 SOLD#3.2
N$19
  Top 0.457: QB2.B 62.55,48.58 62.55,65.72 RB2.P$2
N$20
  Top 0.457: QB2.C 58.42,44.45 58.42,39.37 DB2.A 60.64,36.83 59.05,35.24 59.05,15.87 SOLB2.2
N$21
  Top 0.457: RE3.P$2 QE3.B
N$22
  Top 0.457: QC3.B 68.9,48.58 68.9,65.72 RC3.P$2
N$23
  Top 0.457: QC3.C 64.77,44.45 64.77,39.37 DC3.A 69.22,34.93 69.22,15.87 SOLC3.2
N$24
  Top 0.457: QE3.C 95.25,59.69 95.25,53.98 94.3,53.02 94.3,38.42 DE3.A 90.81,34.93 90.81,15.87 SOLE3.2
N$25
  Top 0.457: RA3.P$2 QA3.B
N$26
  Top 0.457: QA3.C 127,59.69 127,53.98 126.05,53.02 126.05,38.42 DA3.A 122.56,34.93 122.56,15.87 SOLA3.2
N$27
  Top 0.457: QF3.B 100.65,48.58 100.65,53.34 99.06,54.93 RF3.P$2
N$28
  Top 0.457: QF3.C 96.52,44.45 96.52,39.37 DF3.A 100.97,34.93 100.97,15.87 SOLF3.2
N$29
  Top 0.457: QF#3.B 107,48.58 107,65.72 RF#3.P$2
N$30
  Top 0.457: QF#3.C 102.87,44.45 102.87,39.37 DF#3.A 105.41,29.21 103.5,27.3 103.5,15.87 SOLF#3.2
N$31
  Top 0.457: QG3.B 113.35,56.2 113.35,65.72 RG3.P$2
N$32
  Top 0.457: QG3.C 109.22,52.07 109.22,39.37 110.01,38.58 | DG3.A 110.01,38.58 | SOLG3.2 109.86,15.87 109.86,38.42 110.01,38.58
N$33
  Top 0.457: RG#3.P$2 QG#3.B
N$34
  Top 0.457: QG#3.C 120.65,52.07 120.65,46.35 119.7,45.4 119.7,38.42 DG#3.A 118.43,36.83 120.65,34.61 120.65,16.51 SOLG#3.2
N$35
  Top 0.457: QF4.B 176.85,48.58 176.85,53.34 175.26,54.93 RF4.P$2
N$36
  Top 0.457: QF4.C 172.72,44.45 172.72,39.37 DF4.A 177.16,34.93 177.16,15.87 SOLF4.2
N$37
  Top 0.457: QF#4.B 183.2,48.58 183.2,65.72 RF#4.P$2
N$38
  Top 0.457: QF#4.C 184.15,44.45 184.15,39.37 DF#4.A 179.71,34.93 179.71,15.87 SOLF#4.2
N$39
  Top 0.457: QG4.B 189.55,56.2 189.55,62.87 187.96,64.45 RG4.P$2
N$40
  Top 0.457: QG4.C 185.42,52.07 185.42,48.9 187.96,46.35 DG4.A 187.96,35.56 190.5,33.02 190.5,16.51 SOLG4.2
N$41
  Top 0.457: RG#4.P$2 QG#4.B
N$42
  Top 0.457: QG#4.C 196.85,52.07 196.85,46.35 195.9,45.4 195.9,38.42 DG#4.A 194.63,36.83 196.22,35.24 196.22,15.87 SOLG#4.2
N$43
  Top 0.457: RA4.P$2 QA4.B
N$44
  Top 0.457: QA4.C 203.2,59.69 203.2,53.98 202.25,53.02 202.25,38.42 DA4.A 198.12,34.29 198.12,16.51 SOLA4.2
N$45
  Top 0.457: RA#4.P$2 QA#4.B
N$46
  Top 0.457: QA#4.C 209.55,59.69 209.55,53.98 208.6,53.02 208.6,38.42 DA#4.A 205.1,34.93 205.1,15.87 SOLA#4.2
N$47
  Top 0.457: QB4.B 214.95,48.58 214.95,57.15 213.36,58.74 RB4.P$2
N$48
  Top 0.457: QB4.C 210.82,44.45 210.82,39.37 DB4.A 213.04,36.83 211.46,35.24 211.46,15.87 SOLB4.2
N$49
  Top 0.457: QC5.B 219.71,56.83 221.3,58.42 221.3,65.72 RC5.P$2
N$50
  Top 0.457: QC5.C 217.17,44.45 217.17,39.37 DC5.A 219.39,36.83 217.49,34.93 217.49,29.21 217.17,28.89 217.17,16.51 SOLC5.2
N$52
  Top 0.457: RA#3.P$2 QA#3.B
N$53
  Top 0.457: QA#3.C 133.35,59.69 133.35,53.98 132.4,53.02 132.4,38.42 DA#3.A 128.91,34.93 128.91,26.04 130.49,24.45 130.49,14.29 SOLA#3.2
N$55
  Top 0.457: QB3.B 138.75,48.58 138.75,53.34 137.16,54.93 RB3.P$2
N$56
  Top 0.457: QB3.C 134.62,44.45 134.62,39.37 DB3.A 139.06,34.93 139.06,15.87 SOLB3.2
N$58
  Top 0.457: QC4.B 145.1,48.58 145.1,65.72 RC4.P$2
N$59
  Top 0.457: QC4.C 146.05,44.45 146.05,39.37 DC4.A 141.6,34.93 141.6,15.87 SOLC4.2
N$61
  Top 0.457: QC#4.B 151.45,56.2 151.45,65.72 RC#4.P$2
N$62
  Top 0.457: QC#4.C 147.32,52.07 147.32,39.37 DC#4.A 151.76,34.93 151.76,15.87 SOLC#4.2
N$64
  Top 0.457: RD4.P$2 QD4.B
N$65
  Top 0.457: QD4.C 158.75,52.07 158.75,46.35 157.8,45.4 157.8,38.42 DD4.A 154.31,34.93 154.31,15.87 SOLD4.2
N$67
  Top 0.457: RD#4.P$2 QD#4.B
N$68
  Top 0.457: QD#4.C 165.1,59.69 165.1,53.98 164.15,53.02 164.15,38.42 DD#4.A 162.88,36.83 164.47,35.24 164.47,15.87 SOLD#4.2
N$70
  Top 0.457: RE4.P$2 QE4.B
N$71
  Top 0.457: QE4.C 171.45,59.69 171.45,53.98 170.5,53.02 170.5,38.42 DE4.A 167,34.93 167,15.87 SOLE4.2
NU32GND
  Top 0.457: 225.11,83.82 225.11,80.96 NU32_JACK.GNDBREAK | 225.11,83.82 225.11,89.85 49.21,89.85 19.37,60.01 19.37,41.27 11.75,33.65 X1.18 | 225.11,83.82 229.87,83.82 NU32_JACK.GND
NU32PWR  (via drill 0.35)
  Top 0.457: v14.29,34.61 20.32,40.64 20.32,59.69 33.97,73.34 58.42,73.34 58.42,76.52 61.28,79.38 v83.82,79.38 | v87.63,79.38 132.72,79.38 134.94,81.6 175.9,81.6 175.9,81.91 v177.8,83.82
  Bottom 0.457: v14.29,34.61 13.02,35.88 10.16,35.88 8.26,33.97 6.67,33.97 6.35,33.65 X1.6 | v87.63,79.38 v83.82,79.38 | v177.8,83.82 181.29,80.33 216.53,80.33 218.76,78.1 222.88,78.1 223.84,77.15 227.65,77.15 227.97,77.47 229.87,77.47 NU32_JACK.PWR
PS_ON  (via drill 0.35)
  Top 0.457: v5.08,26.99 7.3,26.99 7.94,26.35 7.94,25.08 11.43,25.08 X1.16 | v2.54,27.3 2.86,27.62 2.86,68.9 S1.2
  Bottom 0.457: v5.08,26.99 4.76,27.3 v2.54,27.3
PS_ONGND  (via drill 0.35)
  Top 0.457: v8.26,45.4 8.26,27.3 12.7,27.3 13.34,26.67 13.34,22.54 11.75,20.96 X1.15 | v9.21,47.62 8.26,48.58 8.26,69.85 14.61,76.2 S1.3
  Bottom 0.457: v8.26,45.4 9.21,46.35 v9.21,47.62
RPI_GND  (via drill 0.35)
  Top 0.457: v166.69,1.91 166.69,1.27 13.34,1.27 12.38,2.22 12.38,3.81 11.11,3.81 8.26,6.67 8.26,18.73 6.35,20.64 X1.3 | RPI_JACK.GND 229.87,10.48 234.31,10.48 RPI_JACK.GNDBREAK
  Bottom 0.457: v166.69,1.91 167.32,2.54 221.3,2.54 226.69,7.94 229.87,7.94 RPI_JACK.GND
RPI_PWR  (via drill 0.35)
  Top 0.457: v33.97,3.81 24.45,3.81 20.32,7.94 20.32,14.29 10.79,14.29 9.84,15.24 9.84,21.27 6.35,24.76 X1.4 | v123.19,5.4 v35.56,5.4 | v166.37,5.4 v125.73,5.4
  Bottom 0.457: v35.56,5.4 v33.97,3.81 | v125.73,5.4 v123.19,5.4 | v166.37,5.4 166.69,5.71 221.62,5.71 229.55,13.65 229.87,13.65 RPI_JACK.PWR
VDD1
  Top 0.457: DG#3.C 115.57,26.67 | 115.57,26.67 DG3.C | 115.57,26.67 115.57,11.43 115.73,11.27 | SOLG#3.1 115.73,11.27 | DF#3.C 107.95,24.13 107.95,12.7 | 107.95,12.7 107.95,11.43 SOLF#3.1 SOLF3.1 96.52,11.43 96.52,12.7 | 107.95,12.7 109.7,10.95 | 109.7,10.95 SOLG3.1 | 115.73,11.27 115.57,11.11 109.86,11.11 109.7,10.95 | DF3.C 96.52,26.67 | 96.52,26.67 DE3.C | 96.52,12.7 96.52,26.67 | 96.52,12.7 SOLE3.1 SOLD#3.1 83.98,11.27 | DC3.C 64.77,26.67 | 64.77,26.67 DB2.C | 64.77,12.7 64.77,11.43 SOLC3.1 67.31,9.21 71.12,13.02 | 64.77,12.7 64.77,26.67 | 64.77,12.7 SOLB2.1 SOLA#2.1 52.07,11.43 52.07,13.02 | DD#3.C 83.82,24.13 83.82,11.43 83.98,11.27 | DC#3.C 71.12,24.13 71.12,13.02 | 71.12,13.02 71.12,11.43 SOLC#3.1 73.66,9.21 77.47,13.02 | DD3.C 77.47,24.13 77.47,13.02 | 77.47,13.02 77.47,11.43 77.95,10.95 | SOLD3.1 77.95,10.95 | 83.98,11.27 83.82,11.11 78.11,11.11 77.95,10.95 | DF2.C 22.86,31.12 10.79,31.12 9.84,32.07 9.84,45.4 7.3,47.94 7.3,49.21 6.35,50.16 X1.10 | DA2.C 45.72,24.13 45.72,11.43 45.88,11.27 | 45.88,11.27 SOLA2.1 48.26,9.21 52.07,13.02 | DA#2.C 52.07,24.13 52.07,13.02 | 26.67,8.89 SOLF#2.1 SOLG2.1 39.37,12.7 | 26.67,8.89 SOLF2.1 | DG#2.C 39.37,26.67 | 39.37,26.67 DG2.C | 39.37,12.7 39.37,11.43 39.85,10.95 | 39.37,12.7 39.37,26.67 | SOLG#2.1 39.85,10.95 | 45.88,11.27 45.72,11.11 40.01,11.11 39.85,10.95 | DF#2.C 26.67,24.13 26.67,8.89
  Bottom 0.457: DF#2.C DF2.C
VDD2  (via drill 0.35)
  Top 0.457: DC5.C 219.71,17.46 222.25,14.92 222.25,11.43 SOLC5.1 219.71,9.21 215.9,13.02 | DB4.C 215.9,24.13 215.9,13.02 | 215.9,13.02 215.9,11.43 SOLB4.1 213.36,9.21 209.55,13.02 | DA4.C 203.2,24.13 203.2,11.43 203.04,11.27 | 203.04,11.27 SOLA4.1 SOLG#4.1 191.93,11.27 | DA#4.C 209.55,24.13 209.55,13.02 | 209.55,13.02 209.55,11.43 209.07,10.95 | SOLA#4.1 209.07,10.95 | 203.04,11.27 203.2,11.11 208.91,11.11 209.07,10.95 | DF4.C 172.72,26.67 | 172.72,26.67 DE4.C | 172.72,13.02 172.72,12.7 175.26,10.16 SOLF4.1 SOLF#4.1 185.42,12.7 | 172.72,13.02 172.72,26.67 | DG#4.C 191.77,24.13 191.77,11.43 191.93,11.27 | DG4.C 185.42,26.67 | 185.42,26.67 DF#4.C | 185.42,12.7 185.42,11.43 185.9,10.95 | 185.42,12.7 185.42,26.67 | SOLG4.1 185.9,10.95 | 191.93,11.27 191.77,11.11 186.06,11.11 185.9,10.95 | DD#4.C 160.02,26.67 | 160.02,26.67 DD4.C | 160.02,12.7 160.02,11.43 SOLD#4.1 SOLE4.1 168.91,10.16 171.45,12.7 171.45,13.02 172.72,13.02 | 160.02,12.7 160.02,26.67 | 160.02,12.7 SOLD4.1 SOLC#4.1 147.32,11.43 147.32,12.7 | DC#4.C 147.32,26.67 | 147.32,26.67 DC4.C | 147.32,12.7 147.32,26.67 | 147.32,12.7 SOLC4.1 SOLB3.1 134.78,11.27 | DB3.C 134.62,26.67 | 134.62,26.67 DA#3.C | 134.62,26.67 134.62,11.43 134.78,11.27 | DA3.C 127,24.13 127,12.7 | 127,12.7 127,11.43 SOLA3.1 124.46,2.22 122.87,2.22 122.56,2.54 v13.65,2.54 | v11.11,2.54 3.81,9.84 3.81,52.07 6.03,54.29 X1.11 | 127,12.7 128.75,10.95 | 128.75,10.95 SOLA#3.1 | 134.78,11.27 134.62,11.11 128.91,11.11 128.75,10.95
  Bottom 0.457: v13.65,2.54 v11.11,2.54
(copper drawn outside any net)
  shapes: Top area x1

## Text on the board
Document: AUTOSPIEL v1.0a | OFF | ON | Designer: Jonathan Westerfield '19 | NU_32 PWR | F2 | A3 | F#2 | A#3 | G2 | B3 | G#2 | C4 | A2 | C#4 | PSU PWR CONN | A#2 | D4 | B2 | D#4 | C3 | E4 | C#3 | F4 | D3 | F#4 | D#3 | G4 | E3 | G#4 | F3 | A4 | F#3 | A#4 | G3 | B4 | G#3 | C5 | F2 | F#2 | G2 | G#2 | A2 | A#2 | B2 | C3 | C#3 | D3 | D#3 | E3 | F3 | F#3 | G3 | G#3 | A3 | A#3 | B3 | C4 | C#4 | D4 | D#4 | E4 | F4 | F#4 | G4 | G#4 | A4 | A#4 | B4 | C5 | F2 | F#2 | G2 | G#2 | A2 | A#2 | B2 | C3 | C#3 | D3 | D#3 | E3 | F3 | F#3 | G3 | G#3 | A3 | A#3 | B3 | C4 | C#4 | D4 | D#4 | E4 | F4 | F#4 | G4 | G#4 | A4 | A#4 | B4 | C5 | RPI PWR